# Altium PCB Zoom Camera Controller V1.0.PcbDoc
Units mm, origin at the board's own origin, x right, y up, seen from the top; angles counter-clockwise.
Board outline 35 x 35 mm, 2 copper layers (Top Layer, Bottom Layer); 18 components, 34 nets, 187 pads, 51 vias.
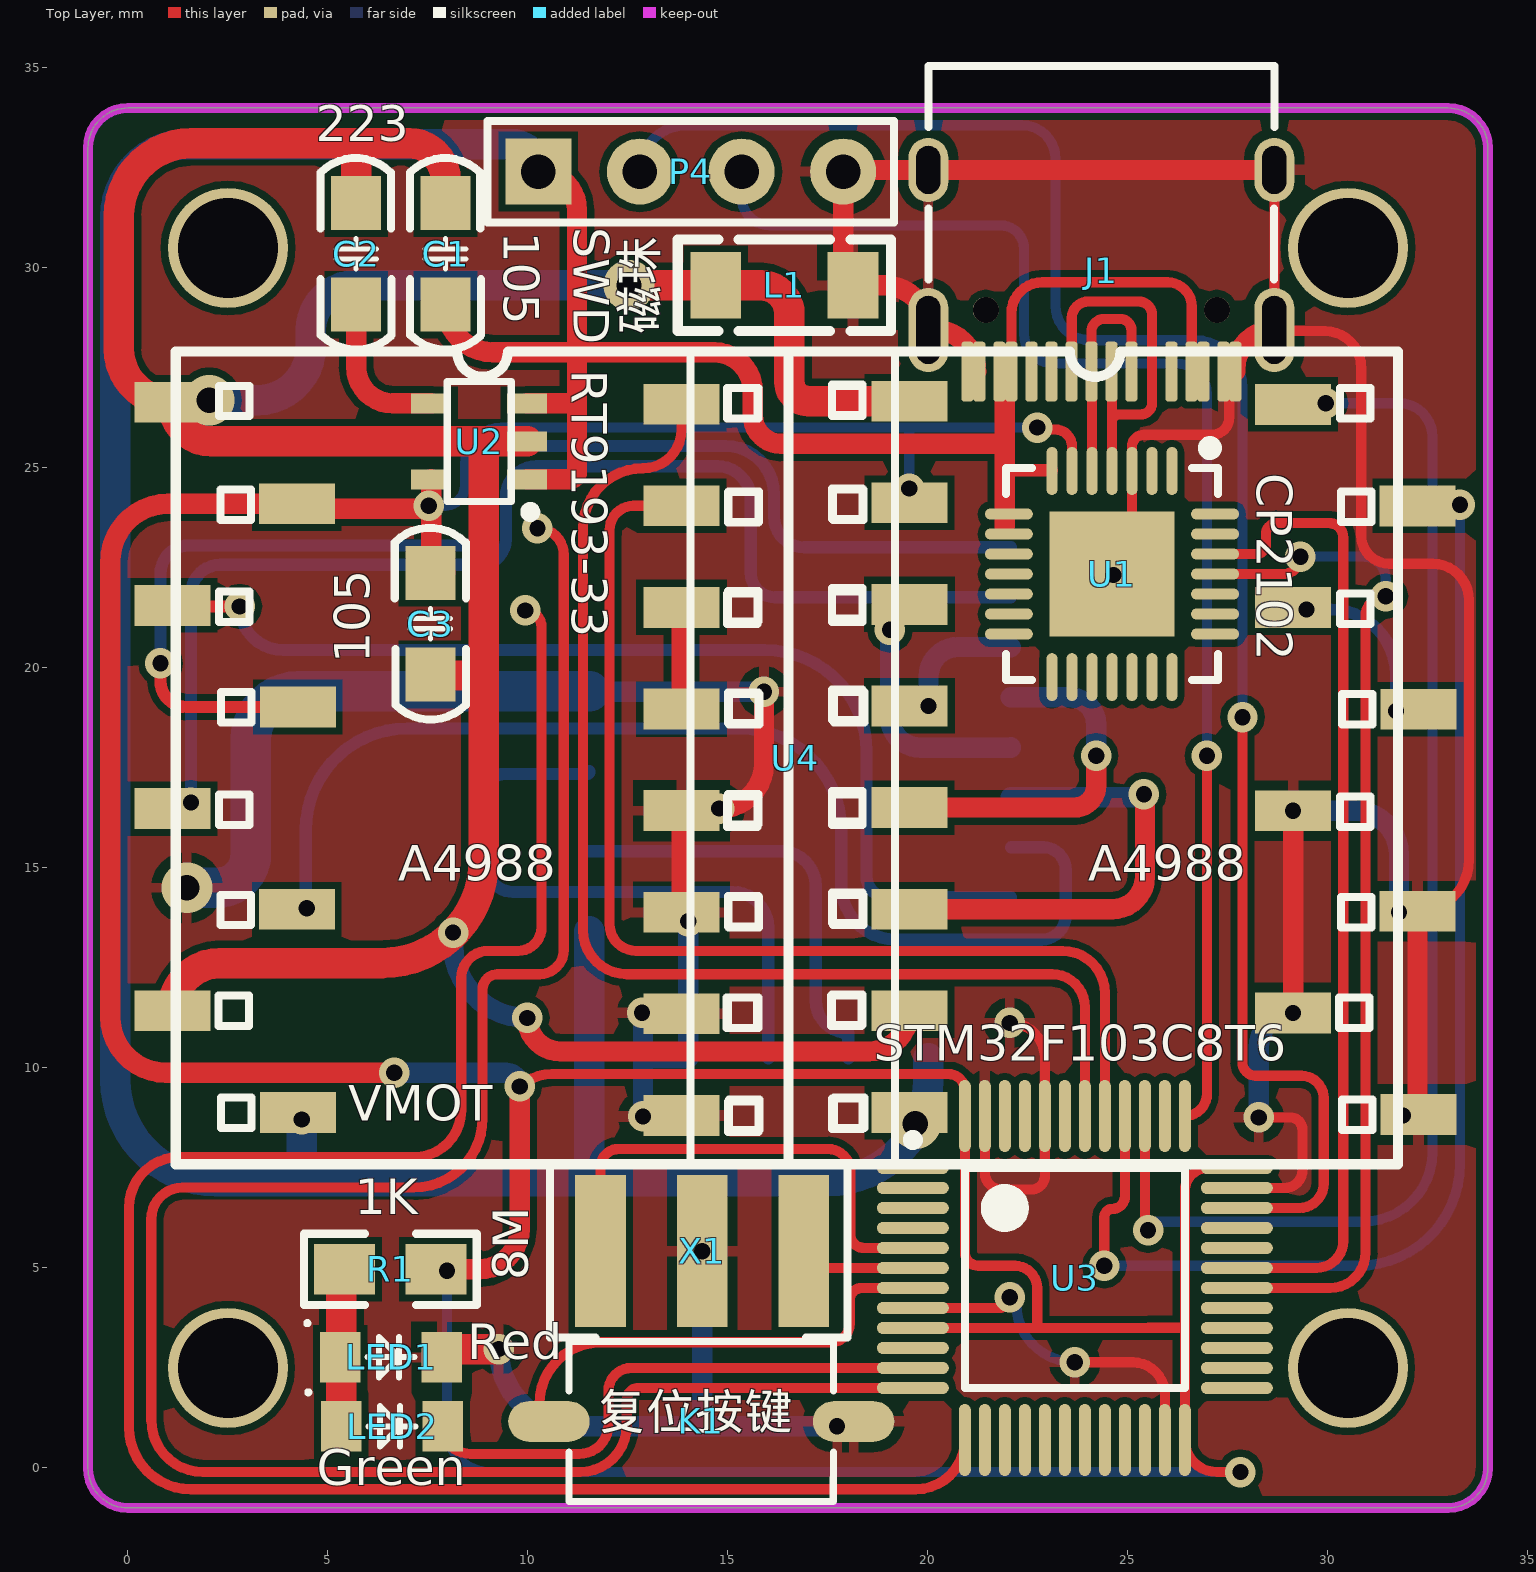
[diagram p0: Top Layer view]
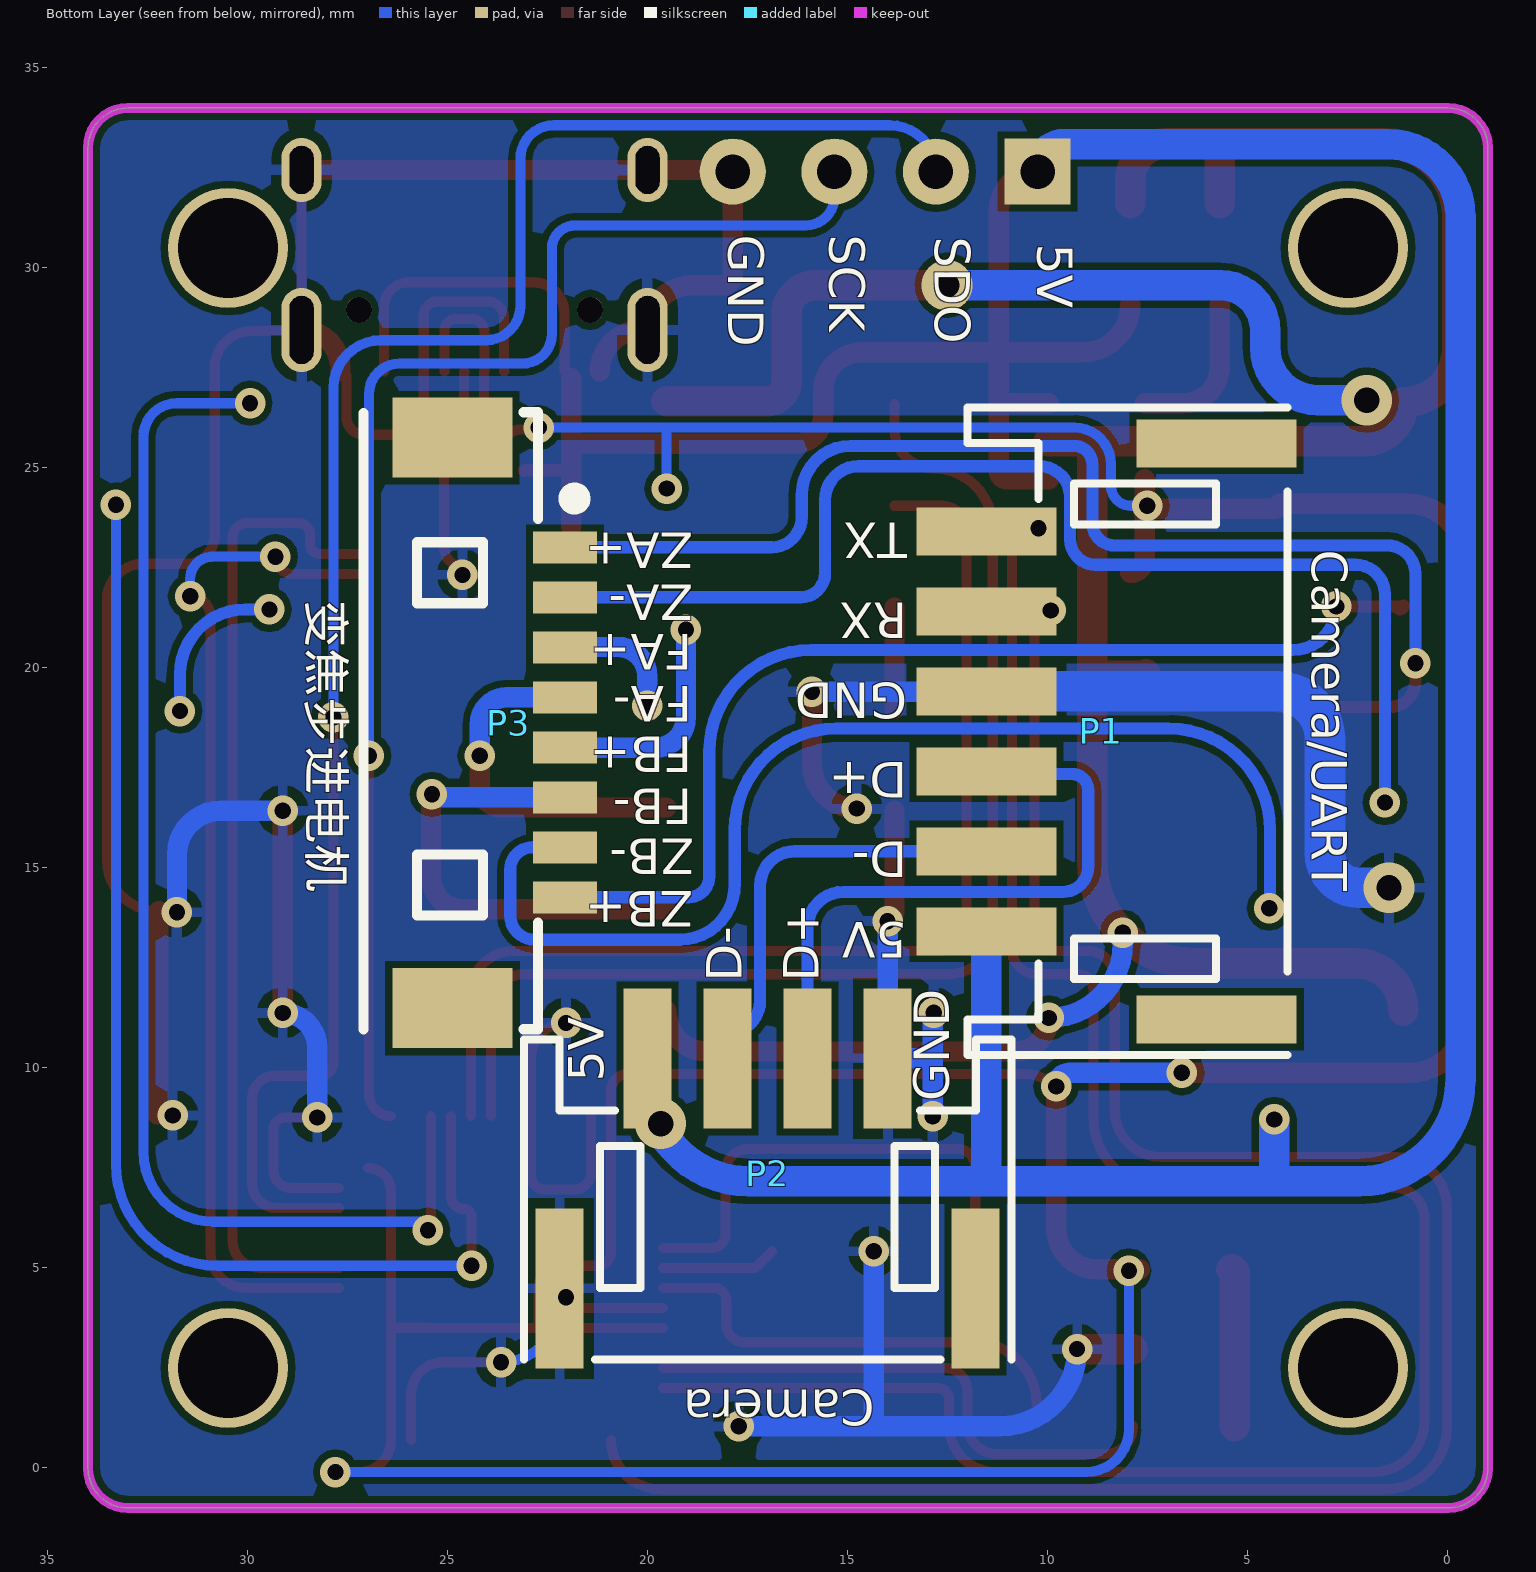
[diagram p1: Bottom Layer view, seen from below]

## Layer stack, top to bottom
Top Solder: solder mask 0.0102, Solder Resist, Dk 3.5
Top Layer: signal copper 0.0356
Dielectric 1: dielectric 0.32, FR-4, Dk 4.8
Bottom Layer: signal copper 0.0356
Bottom Solder: solder mask 0.0102, Solder Resist, Dk 3.5

## Board outline
-1,0 -1,33 cw(c0,33) 0,34 33,34 cw(c33,33) 34,33 34,0 cw(c33,0) 33,-1 0,-1 cw(c0,0)

## Design rules (kind name [scope] priority, off if disabled: settings)
Clearance [All] p1: gap=0.178
ComponentClearance [All] p1: gap=0 collisioncheckmode=3 verticalgap=0 showdistances=FALSE
PolygonConnect [All] p1: connectstyle=Relief reliefconductorwidth=0.254 reliefentries=4 polygonreliefangle="90 Angle" airgapwidth=0.254
RoutingVias [All] p1: holewidth=0.711 width=1.27 viastyle="Through Hole" minholewidth=0.711 minwidth=1.27 maxholewidth=0.711 maxwidth=1.27
SolderMaskExpansion [All] p1: expansion=0.102
Width [All] p1: maxlimit=1.27 minlimit=0.254 preferedwidth=0.508
29 further rules are at their usual default settings.

## Components (designator, comment, footprint, x,y, rotation, side; value= is the part's Value field where it differs from the comment)
C1 "105" 0805C 8.052,31.598 r270 top
C2 "223" 0805C 5.817,31.598 r270 top
C3 "105" 0805C 7.446,19.863 r90 top
J1 "TypeC" "TYPE-C 16P" 24.181,30.785 r90 top
K1 "复位按键" 贴片按键 10.668,1.092 r0 top
L1 "磁珠" 1206L 18.085,29.616 r180 top
LED1 "Red" 0805LED(RED) 5.385,2.896 r0 top
LED2 "Green" 0805LED(GREEN) 5.385,1.092 r0 top
P1 "Camera/UART" PH2.0WS-6P 8.153,18.669 r90 bottom
P2 "Camera" PH2.0WS-4P 16.764,6.452 r180 bottom
P3 "变焦步进电机" MX1.25WS-8P 25.146,18.059 r90 bottom
P4 "SWD" "Header 4" 10.236,32.385 r90 top
R1 "1K" 0805R 5.258,4.953 r0 top
U1 "CP2102" QFN-28 26.518,24.257 r270 top
U2 "RT9193-33" SOT23-5 10.033,24.765 r90 top
U3 "STM32F103C8T6" LQFP-48 23.724,4.75 r0 top locked
U4 "A4988模块" "A4988驱动模块 二合一" 16.739,19.279 r0 top
X1 "8M" 三脚贴片8M晶振 11.811,5.359 r90 top

## Footprints (in the part's own frame and the unit in brackets; to place one, negate y for a bottom-side part, rotate by r counter-clockwise, add the part's x,y. Pads: shape width x height; smd on the part's side, far side on the other; paste and mask are expansions set on the pad)
0805C [mm]
  rect 1.35x1.25 smd: 1(-0.025,-0.112) 2(2.515,-0.112)
  silkscreen extent -1.15,-1 3.64,0.78, body extent -0.03,-0.75 2.48,0.5, height 0.79
0805LED(GREEN) [mil]
  rect 40x50 smd: 1(-2,-2) 2(98,-2)
  silkscreen extent -36,-22 71,33, body extent 7,-27 87,23, height 43
0805LED(RED) [mil]
  rect 40x50 smd: 1(-2.98,-4.95) 2(97.02,-4.95)
  silkscreen extent -37,-25 70,31, body extent 13,-25 80,11, height 35
0805R [mil]
  rect 60x50 smd: 1(6.34,0.5) 2(96.34,0.5)
  silkscreen extent -34,-34 136,36, body extent 2,-24 101,25, height 31
1206L [mil]
  rect 50x65 smd: 1(-1.59,1.89) 2(133.41,1.89)
  silkscreen extent -39,-43 171,47, body extent 3,-28 129,35, height 35
"A4988驱动模块 二合一" [mm]
  rect 1.9x1.02 smd: 1(-15.626,7.366) 2(-12.517,4.826) 3(-15.626,2.286) 4(-12.492,-0.254) 5(-15.626,-2.794) 6(-12.517,-5.309) 7(-15.626,-7.849) 8(-12.492,-10.389) 9(-2.901,-10.465) 10(-2.901,-7.925) 11(-2.901,-5.385) 12(-2.901,-2.845) 13(-2.901,-0.305) 14(-2.901,2.235) 15(-2.901,4.775) 16(-2.901,7.315) 17(2.799,-10.389) 18(2.799,-7.849) 19(2.799,-5.309) 20(2.799,-2.769) 21(2.799,-0.229) 22(2.799,2.311) 23(2.799,4.851) 24(2.799,7.391) 25(15.525,-10.443) 26(12.39,-7.903) 27(15.499,-5.363) 28(12.39,-2.848) 29(15.525,-0.308) 30(12.39,2.232) 31(15.499,4.772) 32(12.39,7.312)
  silkscreen extent -15.54,-11.68 15.01,8.65, body extent -15.54,-11.76 15.01,8.62, height 11.87
"Header 4" [mil]
  rect 65x65 hole 34: 1(0.95,-0.93)
  round 65 hole 34: 2(0.95,-100.93) 3(0.95,-200.93) 4(0.95,-300.93)
  silkscreen extent -49,-351 51,49, body extent -51,-354 49,46, height 336
LQFP-48 [mm]
  oval 1.8x0.3 smd: 1(-4.101,2.75) 2(-4.101,2.25) 3(-4.101,1.75) 4(-4.101,1.25) 5(-4.101,0.75) 6(-4.101,0.25) 7(-4.101,-0.25) 8(-4.101,-0.75) 9(-4.101,-1.25) 10(-4.101,-1.75) 11(-4.101,-2.25) 12(-4.101,-2.75) 25(3.999,-2.75) 26(3.999,-2.25) 27(3.999,-1.75) 28(3.999,-1.25) 29(3.999,-0.75) 30(3.999,-0.25) 31(3.999,0.25) 32(3.999,0.75) 33(3.999,1.25) 34(3.999,1.75) 35(3.999,2.25) 36(3.999,2.75)
  oval 0.3x1.8 smd: 13(-2.801,-4.05) 14(-2.301,-4.05) 15(-1.801,-4.05) 16(-1.301,-4.05) 17(-0.801,-4.05) 18(-0.301,-4.05) 19(0.199,-4.05) 20(0.699,-4.05) 21(1.199,-4.05) 22(1.699,-4.05) 23(2.199,-4.05) 24(2.699,-4.05) 37(2.699,4.05) 38(2.199,4.05) 39(1.699,4.05) 40(1.199,4.05) 41(0.699,4.05) 42(0.199,4.05) 43(-0.301,4.05) 44(-0.801,4.05) 45(-1.301,4.05) 46(-1.801,4.05) 47(-2.301,4.05) 48(-2.801,4.05)
  silkscreen extent -4.23,-2.75 2.7,3.57, body extent -4.55,-4.5 4.45,4.5, height 1.45
MX1.25WS-8P [mm]
  rect 2x3 smd: 0(-6.564,-0.262) 0(7.7,-0.262)
  rect 0.8x1.6 smd: 1(4.956,-3.072) 2(3.706,-3.072) 3(2.456,-3.072) 4(1.206,-3.072) 5(-0.044,-3.072) 6(-1.294,-3.072) 7(-2.544,-3.072) 8(-3.794,-3.072)
  silkscreen extent -7.1,-3.51 8.33,1.97, body extent -7.03,-3.45 8.12,1.74, height 3.4
PH2.0WS-4P [mm]
  rect 1.2x4 smd: 0(-5.445,-1.962) 0(4.955,-1.962)
  rect 1.2x3.5 smd: 1(-3.245,3.788) 2(-1.245,3.788) 3(0.755,3.788) 4(2.755,3.788)
  silkscreen extent -6.34,-3.73 5.85,4.27, body extent -6.24,-3.61 5.76,4.99, height 5.55
PH2.0WS-6P [mm]
  rect 1.2x4 smd: 0(-7.453,-2.365) 0(6.947,-2.365)
  rect 1.2x3.5 smd: 1(-5.253,3.385) 2(-3.253,3.385) 3(-1.253,3.385) 4(0.747,3.385) 5(2.747,3.385) 6(4.747,3.385)
  silkscreen extent -8.35,-4.14 7.84,3.86, body extent -8.25,-4.01 7.75,4.59, height 5.55
QFN-28 [mm] "CP2102  USB转串口芯片"
  rect 3.13x3.13 smd mask+0.051: 0(1.909,-1.918)
  oval 1.2x0.28 smd mask+0.051: 1(-0.668,-0.418) 2(-0.668,-0.918) 3(-0.668,-1.418) 4(-0.668,-1.918) 5(-0.668,-2.418) 6(-0.668,-2.918) 7(-0.668,-3.418) 15(4.486,-3.418) 16(4.486,-2.918) 17(4.486,-2.418) 18(4.486,-1.918) 19(4.486,-1.418) 20(4.486,-0.918) 21(4.486,-0.418)
  oval 0.28x1.2 smd mask+0.051: 8(0.409,-4.495) 9(0.909,-4.495) 10(1.409,-4.495) 11(1.909,-4.495) 12(2.409,-4.495) 13(2.909,-4.495) 14(3.409,-4.495) 22(3.409,0.66) 23(2.909,0.66) 24(2.409,0.66) 25(1.909,0.66) 26(1.409,0.66) 27(0.909,0.66) 28(0.409,0.66)
  silkscreen extent -1.39,-4.57 4.56,0.73, body extent -0.58,-4.42 4.42,0.58, height 1
SOT23-5 [mm]
  rect 0.5x1 smd: 1(-0.051,0.051) 2(0.899,0.051) 3(1.849,0.051) 4(1.849,2.451) 5(-0.051,2.451)
  silkscreen extent -0.99,-0.15 2.4,2.05, body extent -0.55,-0.15 2.35,2.65, height 1.09
"TYPE-C 16P" [mm] "贴片USB-3.1  4固定插脚"
  round 0.65 hole 0.65: 0(-1.834,2.735) 0(-1.834,-3.045)
  oval 1.6x1 hole 0.6 slot 1.2 at 0 deg: 1(1.666,4.17) 2(1.666,-4.48)
  oval 2.1x1 hole 0.6 slot 1.7 at 0 deg: 3(-2.334,-4.48) 4(-2.334,4.17)
  rrect50% 1.5x0.3 smd: A1(-3.374,-3.505) A4(-3.374,-2.705) A6(-3.374,-0.405) A7(-3.374,0.095) A8(-3.374,1.095) A9(-3.374,2.395) A12(-3.374,3.195) B1(-3.374,2.895) B4(-3.374,2.095) B5(-3.374,1.595) B6(-3.374,0.595) B7(-3.374,-0.905) B8(-3.374,-1.905) B9(-3.374,-2.405) B12(-3.374,-3.205)
  rrect50% 0x0 smd: A5(-3.374,-1.405)
  silkscreen extent -1.07,-4.48 4.27,4.17, body extent -3.45,-4.65 4.45,4.29, height 3.25
三脚贴片8M晶振 [mm] "CSTCC8M00G53-RO"
  rect 3.8x1.27 smd: 1(0.06,-0.006) 2(0.06,-5.086) 3(0.06,-2.546)
  silkscreen extent -2.1,-6.18 2.24,1.26, body extent -1.72,-6.23 1.84,1.26, height 1.5
贴片按键 [mil]
  oval 80x40 smd: 1(-5.71,2.8) 2(294.29,2.8)
  silkscreen extent 14,-76 274,82, body extent 24,-69 264,77, height 98

## Part data
C1 C2 C3: library part Cap1, "无极贴片电容"
K1: library part 贴片按键, "轻触开关"
L1: library part L, "电感"
LED1 LED2: library part LED, "发光二极管"
P1: library part 接线端子-6PIN, "6PIN"
P2: library part 接线端子-4PIN, "4PIN"
P3: library part 接线端子-8PIN
P4: library part "Header 4", "排针"
R1: library part Res, "电阻"
U1: "USB转串口芯片"
U2: library part RT9193
U3: "STM32单片机48引脚"
U4: library part "A4988 二合一模块"
X1: library part XTAL三脚贴片晶振

## Free pads (board coordinates)
  round 3 hole 2.5: 0(2.5,2.5) 0(2.5,30.5) 0(30.5,2.5) 0(30.5,30.5)

## Via types
v1: diameter 0.762, hole 0.406, Top Layer to Bottom Layer, 47 vias
v2: diameter 1.27, hole 0.635, Top Layer to Bottom Layer, 4 vias

## Nets (pads, with @x,y where several pads share a name; then routed paths per layer and width w, separated by ;. In a path a pad name is that pad's centre, name@x,y a point inside that pad or via, vN(x,y) a via of type N, cw(c..) or ccw(c..) an arc to the next point about the centre after c; other vN are vias at no path point)
3.3V: C3.2 R1.2 U1.6 U2.5 U3.9 U3.24 U3.36 U3.48 U4.2 U4.23 | length 119.2
  Top Layer w0.254: v1(9.793,9.539) cw(c10.599,8.655) 10.599,9.851 20.508,9.851 cw(c20.508,9.436) 20.923,9.436 U3.48 20.923,5.392 ccw(c21.26,5.392) 21.26,5.055 22.17,5.055 cw(c22.17,4.492) 22.733,4.492 22.733,3.5 ; U3.9 22.733,3.5 ; v1@22.708,25.959 23.19,25.959 cw(c23.19,25.549) 23.6,25.549 U1.6 ; U3.36@27,7.5 ccw(c27,6.922) 26.423,6.922 26.423,3.505 ; v1(27.813,-0.102) 27.224,-0.102 cw(c27.224,0.7) U3.24 26.423,3.505 ; 22.733,3.5 25.514,3.5 25.514,3.505 26.423,3.505
  Top Layer w0.508: v1(6.655,9.881) 0.956,9.881 cw(c0.956,11.278) -0.441,11.278 -0.441,22.657 cw(c1.007,22.657) 1.007,24.105 U4.2 ccw(c4.349,24.105) 4.349,23.978 v1@7.582,23.978 ; U2.5 v1@7.582,23.978 ; R1.2 8.782,4.966 ccw(c8.782,5.977) 9.793,5.977 v1(9.793,9.539) ; C3.2@7.939,22.378 cw(c7.939,22.735) 7.582,22.735 v1@7.582,23.978
  Bottom Layer w0.254: v1(7.518,24.054) 7.923,24.054 ccw(c7.923,24.555) 8.424,24.555 8.424,25.095 cw(c9.338,25.095) 9.338,26.01 19.583,26.01 ; v1(7.976,4.928) 7.976,0.965 ccw(c9.042,0.965) 9.042,-0.102 v1(27.813,-0.102) ; v1(19.533,24.486) 19.533,25.959 cw(c19.583,25.959) 19.583,26.01 ; v1(22.733,26.01) 19.583,26.01
  Bottom Layer w0.508: v1(6.655,9.881) 9.452,9.881 cw(c9.452,9.539) v1(9.793,9.539)
5.0V: C1.2 J1.A4 J1.A9 J1.B4 J1.B9 P1.1 P2.1 P4.1 U1.7 U1.8 U1.9 U2.1 U2.3 U4.8 U4.17 | length 105.4
  Top Layer w0.254: J1.B4 22.086,28.867 cw(c22.86,28.867) 22.86,29.642 25.986,29.642 cw(c25.986,29.032) 26.596,29.032 26.596,27.411 J1.B9
  Top Layer w0.305: 21.92,24.943 23.1,24.943 U1.7
  Top Layer w0.508: C1.2 ccw(c9.133,29.083) 9.133,27.889 11.227,27.889 ; U2.1 11.024,24.714 ccw(c11.024,24.917) 11.227,24.917 11.227,26.411 ; U2.3 11.024,26.614 cw(c11.024,26.411) 11.227,26.411 ; P4.1 cw(c10.26,31.442) 11.227,31.442 11.227,27.889 ; 21.92,23.546 21.92,24.943 21.92,25.603 ; J1.A9@21.92,27.245 21.92,25.603 ; 11.227,26.411 11.227,27.889 ; 11.227,27.889 14.656,27.889 cw(c14.656,26.924) 15.621,26.924 15.621,26.314 ccw(c16.332,26.314) 16.332,25.603 21.92,25.603
  Bottom Layer w0.762: v1(4.343,8.712) 4.343,7.163 ; P4.1 ccw(c9.573,32.409) 9.573,33.096 1.499,33.096 ccw(c1.499,31.283) -0.314,31.283 -0.314,9.703 ccw(c2.226,9.703) 2.226,7.163 4.343,7.163 ; P1.1 11.538,7.207 ccw(c11.582,7.207) 11.582,7.163 ; P2.1 20.009,9.703 cw(c17.469,9.703) 17.469,7.163 11.582,7.163 ; 4.343,7.163 11.582,7.163
  other v2: 19.685,8.611
CP_USB_D+: J1.A6 J1.B6 U1.4 | length 9.6
  Top Layer w0.254: J1.B6 23.597,27.411 23.597,28.753 cw(c24.003,28.753) 24.003,29.159 25.273,29.159 cw(c25.273,28.829) 25.603,28.829 25.603,26.619 cw(c25.324,26.619) 25.324,26.34 24.778,26.34 ccw(c24.778,26.162) 24.6,26.162 ; J1.A6 24.6,27.411 24.6,26.162 ; U1.4@24.6,25.103 24.6,26.162
CP_USB_D-: J1.A7 J1.B7 U1.5 | length 5.7
  Top Layer w0.254: U1.5@24.1,25.103 24.1,27.411 J1.A7 24.086,28.404 cw(c24.409,28.404) 24.409,28.727 24.806,28.727 cw(c24.806,28.448) 25.086,28.448 J1.B7
DGND: J1.1 J1.2 J1.3 J1.4 J1.A1 J1.A12 J1.B1 J1.B12 K1.2 L1.1 LED1.2 P1.4 P2.0@22.209,4.489 P2.4 P4.4 U1.0 U1.3 U3.8 U3.23 U3.35 U3.44 U3.47 U4.9 U4.10 U4.11 U4.12 U4.25 U4.26 U4.27 U4.28 X1.3 | length 136.2
  Top Layer w0.254: U3.8 21.78,4 ccw(c21.78,4.267) v1(22.047,4.267) ; U3.47 21.423,7.381 ccw(c21.844,7.381) 21.844,6.96 22.581,6.96 ccw(c22.581,7.302) 22.923,7.302 U3.44 22.923,10.25 ccw(c22.047,10.25) v1(22.047,11.125) ; v1(23.673,2.642) 25.12,2.642 cw(c25.12,1.839) 25.923,1.839 U3.23 ; U1.0@24.6,22.526 ccw(c24.6,23.026) 25.1,23.026 U1.3 25.1,25.53 cw(c25.4,25.53) 25.4,25.83 27.1,25.83 ccw(c27.1,26.264) 27.534,26.264 27.534,27.259 cw(c27.686,27.259) J1.A1 ; U3.35 28.92,7 ccw(c28.92,7.442) 29.362,7.442 29.362,8.458 ccw(c29.058,8.458) 29.058,8.763 v1(28.27,8.763) ; J1.2 J1.3 ccw(c28.689,28.451) 28.689,28.423 29.921,28.423 cw(c29.921,27.513) 30.831,27.513 30.831,23.317 ccw(c31.542,23.317) 31.542,22.606 32.617,22.606 cw(c32.617,21.695) 33.528,21.695 33.528,15.206 cw(c32.238,15.206) U4.27
  Top Layer w0.508: U4.11 U4.12 ; v1(14.783,16.485) ccw(c14.783,17.602) 15.9,17.602 v1(15.9,19.406) ; J1.B1@21.204,27.411 ccw(c20.164,27.411) 20.164,28.451 J1.4 ccw(c18.893,28.451) 18.893,29.568 L1.1 cw(c18.125,29.814) 17.88,29.814 P4.4 cw(c17.921,32.409) 17.921,32.451 J1.1 J1.2 ; J1.A1 27.686,27.476 cw(c28.661,27.476) J1.3 ; v1(29.129,11.376) v1(29.129,16.431) ; U4.27 32.238,8.861 ccw(c32.263,8.861) U4.25
  Top Layer w0.762: LED1.2@7.874,2.972 v1(9.271,2.972)
  Bottom Layer w0.254: P2.0@22.209,4.489 22.209,4.106 ccw(c23.673,4.106) v1(23.673,2.642)
  Bottom Layer w0.508: v1(9.271,2.972) ccw(c11.201,2.972) 11.201,1.041 14.402,1.041 ; P1.4 11.538,19.406 v1(15.9,19.406) ; v1(12.852,11.379) cw(c12.852,11.354) 12.878,11.354 12.878,10.185 ; v1(12.878,8.788) 12.878,10.185 ; v1@14.009,13.716 P2.4 12.932,10.239 ccw(c12.932,10.185) 12.878,10.185 ; v1(14.357,5.419) 14.357,1.086 ccw(c14.402,1.086) 14.402,1.041 ; v1(17.729,1.041) 14.402,1.041 ; v1(28.27,8.763) 28.27,10.518 cw(c29.129,10.518) v1(29.129,11.376) ; v1(29.129,16.431) 30.676,16.431 cw(c30.676,15.331) 31.775,15.331 v1(31.775,13.894)
  Bottom Layer w1.016: v2(1.473,14.503) 2.223,14.503 ccw(c2.223,15.354) 3.073,15.354 3.073,18.219 cw(c4.27,18.219) 4.27,19.416 P1.4
  other v1: 31.877,8.814 14.009,13.665 24.638,22.327
DIR1(B6): U3.42 U4.16 | length 30.9
  Top Layer w0.254: U4.16 13.838,25.954 cw(c12.878,25.954) 12.878,24.994 ccw(c12.878,23.495) 11.379,23.495 11.379,13.44 ccw(c12.475,13.44) 12.475,12.344 23.102,12.344 cw(c23.102,11.523) 23.923,11.523 U3.42
DIR2(B3): U3.39 U4.32 | length 32.1
  Top Layer w0.254: U3.39 25.423,6.022 ccw(c25.502,6.022) v1(25.502,5.944)
  Bottom Layer w0.254: v1(25.502,5.944) 25.716,6.158 30.872,6.158 ccw(c30.872,7.899) 32.614,7.899 32.614,25.781 ccw(c31.775,25.781) 31.775,26.619 v1(29.947,26.619)
FOCUS_A+: P3.3 U4.21 | length 3.2
  Bottom Layer w0.508: v1(20.015,19.05) 20.015,19.787 cw(c20.752,19.787) 20.752,20.523 22.074,20.523 P3.3
FOCUS_A-: P3.4 U4.20 | length 9
  Top Layer w0.508: U4.20 23.66,16.51 ccw(c23.66,17.056) 24.206,17.056 v1(24.206,17.805)
  Bottom Layer w0.508: P3.4 23.533,19.266 cw(c23.533,18.593) 24.206,18.593 v1(24.206,17.805)
FOCUS_B+: P3.5 U4.22 | length 5.7
  Bottom Layer w0.508: v1(19.05,20.955) 19.05,18.771 ccw(c19.812,18.771) 19.812,18.009 22.074,18.009 P3.5
FOCUS_B-: P3.6 U4.19 | length 11.8
  Top Layer w0.508: U4.19 24.613,13.97 ccw(c24.613,14.783) 25.425,14.783 25.425,16.815 ccw(c25.4,16.815) v1(25.4,16.84)
  Bottom Layer w0.508: P3.6 25.326,16.766 ccw(c25.326,16.84) v1(25.4,16.84)
GND: C1.1 C2.1 C3.1 L1.2 U2.2 U4.1 U4.7 U4.18 U4.24 | length 84.4
  Top Layer w0.508: C3.1 C3.1@7.925,19.838 ; v1(9.982,11.252) ccw(c10.822,11.252) 10.822,10.412 18.52,10.412 ccw(c18.52,11.43) U4.18
  Top Layer w0.762: U4.7 cw(c2.306,11.43) 2.306,12.624 6.35,12.624 ccw(c6.35,15.164) 8.89,15.164 8.89,19.812 ; C2.1 5.704,33.031 ccw(c5.613,33.031) 5.613,33.122 ; C3.1 ccw(c7.584,19.838) 7.584,19.812 8.89,19.812 ; C1.1 7.939,32.208 ccw(c7.026,32.208) 7.026,33.122 5.613,33.122 ; U2.2 9.017,25.664 ; v2(12.525,29.568) L1.2 15.821,29.568 cw(c15.821,28.854) 16.535,28.854 16.535,27.153 ccw(c17.018,27.153) 17.018,26.67 U4.24 ; 5.613,33.122 1.6,33.122 ccw(c1.6,31.293) -0.229,31.293 -0.229,27.986 ccw(c1.112,27.986) U4.1 ccw(c2.093,26.645) 2.093,25.664 9.017,25.664 ; 8.89,19.812 8.89,25.537 cw(c9.017,25.537) 9.017,25.664
  Bottom Layer w0.508: v1(8.128,13.386) 8.128,13.106 ccw(c9.982,13.106) v1(9.982,11.252)
  Bottom Layer w0.762: v2(2.032,26.695) 3.245,26.695 ccw(c3.245,28.022) 4.572,28.022 4.572,28.448 cw(c5.692,28.448) 5.692,29.568 v2(12.525,29.568)
NetC2_2: C2.2 U2.4 | length 4
  Top Layer w0.508: C2.2 5.704,27.535 ccw(c6.625,27.535) 6.625,26.614 U2.4
NetLED1_1: LED1.1 LED2.1 R1.1 | length 4
  Top Layer w0.762: LED2.1 5.334,2.972 5.334,4.881 cw(c5.419,4.881) R1.1
NetU4_13: U4.13 U4.14 | length 2.5
  Top Layer w0.508: U4.13 U4.14
NetU4_29: U4.29 U4.30 | length 4.1
  Bottom Layer w0.305: v1(29.464,21.463) 30.072,21.463 cw(c30.072,19.836) 31.699,19.836 v1(31.699,18.923)
NRST: K1.1 U3.7 | length 11.2
  Top Layer w0.254: K1.1@10.287,1.6 cw(c11.83,1.6) 11.83,3.143 17.585,3.143 ccw(c17.585,3.603) 18.044,3.603 18.044,4.196 cw(c18.348,4.196) 18.348,4.5 U3.7
OSCIN: U3.5 X1.1 | length 12.3
  Top Layer w0.254: X1.1 11.817,7.528 cw(c12.264,7.528) 12.264,7.976 17.501,7.976 cw(c17.501,7.417) 18.059,7.417 18.059,5.842 ccw(c18.402,5.842) 18.402,5.5 U3.5
OSCOUT: U3.6 X1.2 | length 2.9
  Top Layer w0.254: X1.2 17.317,5 U3.6
STM32_RXD1: U1.26 U3.31 | length 24.6
  Top Layer w0.254: U1.26 28.214,22.848 ccw(c28.214,23.082) 28.448,23.082 28.448,23.343 cw(c28.727,23.343) 28.727,23.622 30.023,23.622 cw(c30.023,23.261) 30.383,23.261 30.383,5.675 cw(c29.708,5.675) 29.708,5 U3.31
STM32_RXD2: P1.5 U3.13 | length 51.9
  Top Layer w0.254: v1(9.931,21.438) cw(c9.931,21.031) 10.338,21.031 10.338,13.513 cw(c9.754,13.513) 9.754,12.929 9.017,12.929 ccw(c9.017,12.243) 8.331,12.243 8.331,8.941 cw(c7.163,8.941) 7.163,7.772 1.289,7.772 ccw(c1.289,6.509) 0.025,6.509 0.025,1.016 ccw(c1.575,1.016) 1.575,-0.533 19.69,-0.533 ccw(c19.69,0.7) U3.13
STM32_TXD1: U1.25 U3.30 | length 25.7
  Top Layer w0.254: U1.25 28.876,22.348 ccw(c28.876,22.784) v1(29.312,22.784) ; U3.30 30.053,4.5 ccw(c30.053,5.384) 30.937,5.384 30.937,21.285 cw(c31.445,21.285) v1(31.445,21.793)
  Bottom Layer w0.254: v1(29.312,22.784) 30.886,22.784 cw(c30.886,22.225) 30.964,22.778 cw(c30.886,22.225) 31.445,22.225 v1(31.445,21.793)
STM32_TXD2: P1.6 U3.12 | length 52.7
  Top Layer w0.254: v1(10.236,23.495) cw(c10.236,22.835) 10.897,22.835 10.897,12.954 cw(c10.287,12.954) 10.287,12.344 9.246,12.344 ccw(c9.246,11.963) 8.865,11.963 8.865,8.738 cw(c7.137,8.738) 8.463,7.63 cw(c7.137,8.738) 7.137,7.01 1.365,7.01 ccw(c1.365,6.23) 0.584,6.23 0.584,1.194 ccw(c1.88,1.194) 1.88,-0.102 11.303,-0.102 ccw(c11.303,1.067) 11.658,-0.046 ccw(c11.303,1.067) 12.471,1.067 12.471,1.702 cw(c12.769,1.702) 12.769,2 U3.12
SWCLK(A14): P4.3 U3.37 | length 34.4
  Top Layer w0.254: U3.37 ccw(c26.423,9.352) 26.975,9.352 v1(26.975,17.805)
  Bottom Layer w0.254: P4.3 15.34,31.777 ccw(c16.053,31.777) 16.053,31.064 21.819,31.064 cw(c21.819,30.48) 22.403,30.48 22.403,28.346 ccw(c23.139,28.346) 23.139,27.61 26.213,27.61 cw(c26.213,26.848) 26.975,26.848 v1(26.975,17.805)
SWDIO(A13): P4.2 U3.34 | length 45.1
  Top Layer w0.254: U3.34 29.284,6.5 ccw(c29.284,7.112) 29.896,7.112 29.896,9.241 ccw(c29.333,9.241) 29.333,9.804 28.194,9.804 cw(c28.194,10.135) 27.864,10.135 v1(27.864,18.771)
  Bottom Layer w0.254: P4.2 cw(c13.959,32.409) 13.959,33.568 22.352,33.568 cw(c22.352,32.73) 23.19,32.73 23.19,29.054 ccw(c24.05,29.054) 24.05,28.194 26.67,28.194 cw(c26.67,27) 27.864,27 v1(27.864,18.771)
SYS_LED(A1): LED2.2 U3.11 | length 13.7
  Top Layer w0.254: LED2.2 ccw(c8.565,1.041) 8.565,0.35 11.278,0.35 ccw(c11.278,1.087) 12.014,1.087 12.014,1.93 cw(c12.584,1.93) 12.584,2.5 U3.11
TIM3_CH1(B4): U3.40 U4.31 | length 30.9
  Top Layer w0.254: v1(24.409,5.055) 24.409,6.274 cw(c24.613,6.274) 24.613,6.477 ccw(c24.613,6.787) 24.923,6.787 U3.40
  Bottom Layer w0.254: v1(24.409,5.055) 30.759,5.055 ccw(c30.759,7.595) 33.299,7.595 v1(33.299,24.079)
TIM3_CH2(B5): U3.41 U4.15 | length 28.4
  Top Layer w0.254: U4.15 12.644,24.054 ccw(c12.644,23.449) 12.04,23.449 12.04,13.593 ccw(c12.704,13.593) 12.704,12.929 23.362,12.929 cw(c23.362,11.868) 24.423,11.868 U3.41
USB_DM: P1.2 P2.2 | length 10.9
  Bottom Layer w0.305: P1.2 16.334,15.416 cw(c16.334,14.554) 16.452,15.408 cw(c16.334,14.554) 17.196,14.554 17.196,11.684 ccw(c18.009,11.684) 18.009,10.871 P2.2
USB_DP: P1.3 P2.3 | length 15.9
  Bottom Layer w0.305: P1.3 cw(c11.471,17.416) 11.471,17.348 9.398,17.348 ccw(c9.398,16.942) 8.992,16.942 8.992,15.037 ccw(c9.627,15.037) 9.627,14.402 15.113,14.402 cw(c15.113,13.506) 16.009,13.506 P2.3
ZOOM_A+: P3.1 U4.4 | length 31.9
  Top Layer w0.305: v1(0.813,20.117) 0.813,19.674 ccw(c1.463,19.674) 1.463,19.025 U4.4
  Bottom Layer w0.305: v1(0.813,20.117) 0.813,22.352 cw(c1.524,22.352) 1.524,23.063 8.331,23.063 ccw(c8.331,23.622) 8.89,23.622 8.89,25.095 cw(c9.347,25.095) 9.347,25.552 14.935,25.552 cw(c14.935,24.333) 16.154,24.333 16.154,23.774 ccw(c16.913,23.774) 16.913,23.016 P3.1
ZOOM_A-: P3.2 U4.5 | length 30.6
  Bottom Layer w0.305: v1(1.575,16.637) 1.575,21.844 cw(c2.311,21.844) 2.311,22.581 8.814,22.581 ccw(c8.814,23.216) 9.224,22.731 ccw(c8.814,23.216) 9.449,23.216 9.449,24.282 cw(c10.211,24.282) 10.211,25.044 14.732,25.044 cw(c14.732,24.206) 15.57,24.206 15.57,22.377 ccw(c16.182,22.377) 16.182,21.766 P3.2
ZOOM_B+: P3.8 U4.3 | length 26.6
  Top Layer w0.305: U4.3@1.214,21.463 cw(c1.214,21.565) U4.3 ccw(c1.138,21.565) 1.138,21.539 v1(2.794,21.539)
  Bottom Layer w0.305: v1(2.794,21.539) ccw(c3.886,21.539) 3.886,20.447 15.926,20.447 cw(c15.926,17.907) 18.466,17.907 18.466,14.783 ccw(c18.983,14.783) 18.983,14.266 P3.8
ZOOM_B-: P3.7 U4.6 | length 29.2
  Bottom Layer w0.305: v1@4.445,14.021 4.445,15.946 cw(c6.985,15.946) 6.985,18.486 15.291,18.486 cw(c15.291,15.946) 17.831,15.946 17.831,14.58 ccw(c19.202,14.58) 19.202,13.208 22.835,13.208 ccw(c22.835,13.818) 23.444,13.818 23.444,14.961 ccw(c22.889,14.961) 22.889,15.516 P3.7
  other v1: 4.47,13.995
pads on no net: J1.0 J1.A5 J1.A8 J1.B5 J1.B8 P1.0 P2.0@11.809,4.489 P3.0 U1.1 U1.2 U1.10 U1.11 U1.12 U1.13 U1.14 U1.15 U1.16 U1.17 U1.18 U1.19 U1.20 U1.21 U1.22 U1.23 U1.24 U1.27 U1.28 U3.1 U3.2 U3.3 U3.4 U3.10 U3.14 U3.15 U3.16 U3.17 U3.18 U3.19 U3.20 U3.21 U3.22 U3.25 U3.26 U3.27 U3.28 U3.29 U3.32 U3.33 U3.38 U3.43 U3.45 U3.46

## Polygon pours and split planes (outlines as drawn)
DGND on Bottom Layer "Top Layer-No Net" (solid, remove dead copper, pour order 4): -3.429,30.48 -3.429,32.614 cw(c-0.889,32.614) -0.889,35.154 0.254,35.154 32.385,35.154 cw(c32.385,32.614) 34.925,32.614 34.925,25.425 34.925,0.33 cw(c32.487,0.33) 32.487,-2.108 -1.778,-2.108 cw(c-1.778,-0.838) -3.048,-0.838
DGND on Top Layer "Top Layer-No Net" (solid, remove dead copper, pour order 6): -2.591,26.645 -2.591,32.766 cw(c-0.356,32.766) -0.356,35.001 32.588,35.001 cw(c32.588,32.461) 35.128,32.461 35.128,30.429 35.128,0.33 cw(c32.588,0.33) 32.588,-2.21 32.334,-2.21 -0.838,-2.21 cw(c-0.838,-0.457) -2.591,-0.457

## Keep-outs
Keep-Out Layer:
  the board outline again, w0.254

## Silkscreen, mask and mechanical layers (free items; w line width, h text height)
Top Overlay:
  text "A4988" at 6.756,14.376 h1.52
  text "A4988" at 24.003,14.376 h1.52
Bottom Overlay:
  text "SCK" at 15.773,30.836 h1.52 r90
  text "GND" at 18.288,30.836 h1.52 r90
  text "SDO" at 13.132,30.785 h1.52 r90
  text "5V" at 10.566,30.607 h1.52 r90
  text "TX" at 13.524,23.929 h1.52 r180
  text "ZA+" at 18.864,23.68 h1.52 r180
  text "ZA-" at 18.864,22.384 h1.52 r180
  text "RX" at 13.524,21.934 h1.52 r180
  text "FA+" at 18.889,21.14 h1.52 r180
  text "GND" at 13.524,19.928 h1.52 r180
  text "FA-" at 18.889,19.844 h1.52 r180
  text "FB+" at 18.889,18.574 h1.52 r180
  text "D+" at 13.524,17.945 h1.52 r180
  text "FB-" at 18.889,17.279 h1.52 r180
  text "ZB-" at 18.838,16.034 h1.52 r180
  text "D-" at 13.524,15.95 h1.52 r180
  text "ZB+" at 18.864,14.714 h1.52 r180
  text "5V" at 13.525,13.945 h1.52 r180
  text "D+" at 15.429,12.16 h1.52 r270
  text "D-" at 17.351,12.16 h1.52 r270
  text "5V" at 20.803,9.652 h1.52 r270
  text "GND" at 12.167,9.169 h1.52 r270

## Text inside footprints (layer, text, board x,y; h text height)
U4: Top Overlay "VMOT" at 5.512,8.382 h1.52